# EAGLE board SparkFun_Touch_Screen_Connector_Breakout_DS_Panel_v11b (EAGLE 7.5.0)
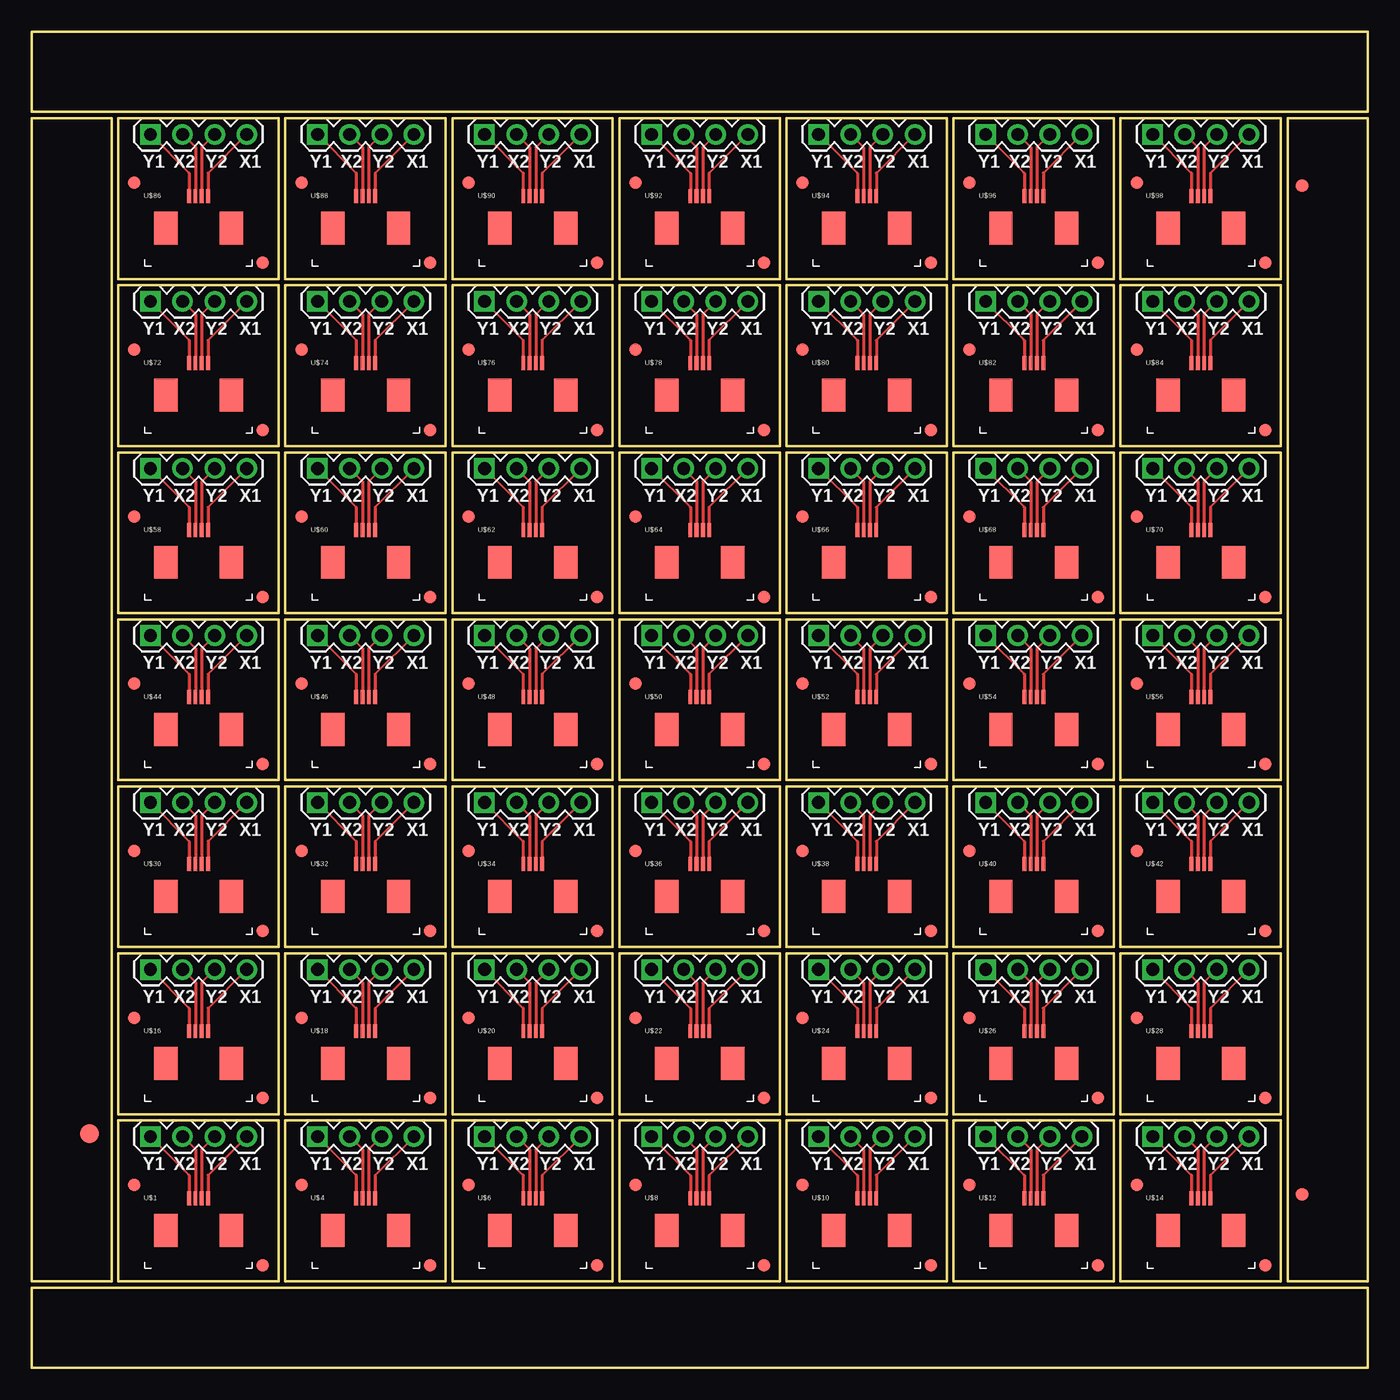
[diagram p0: board, top side]
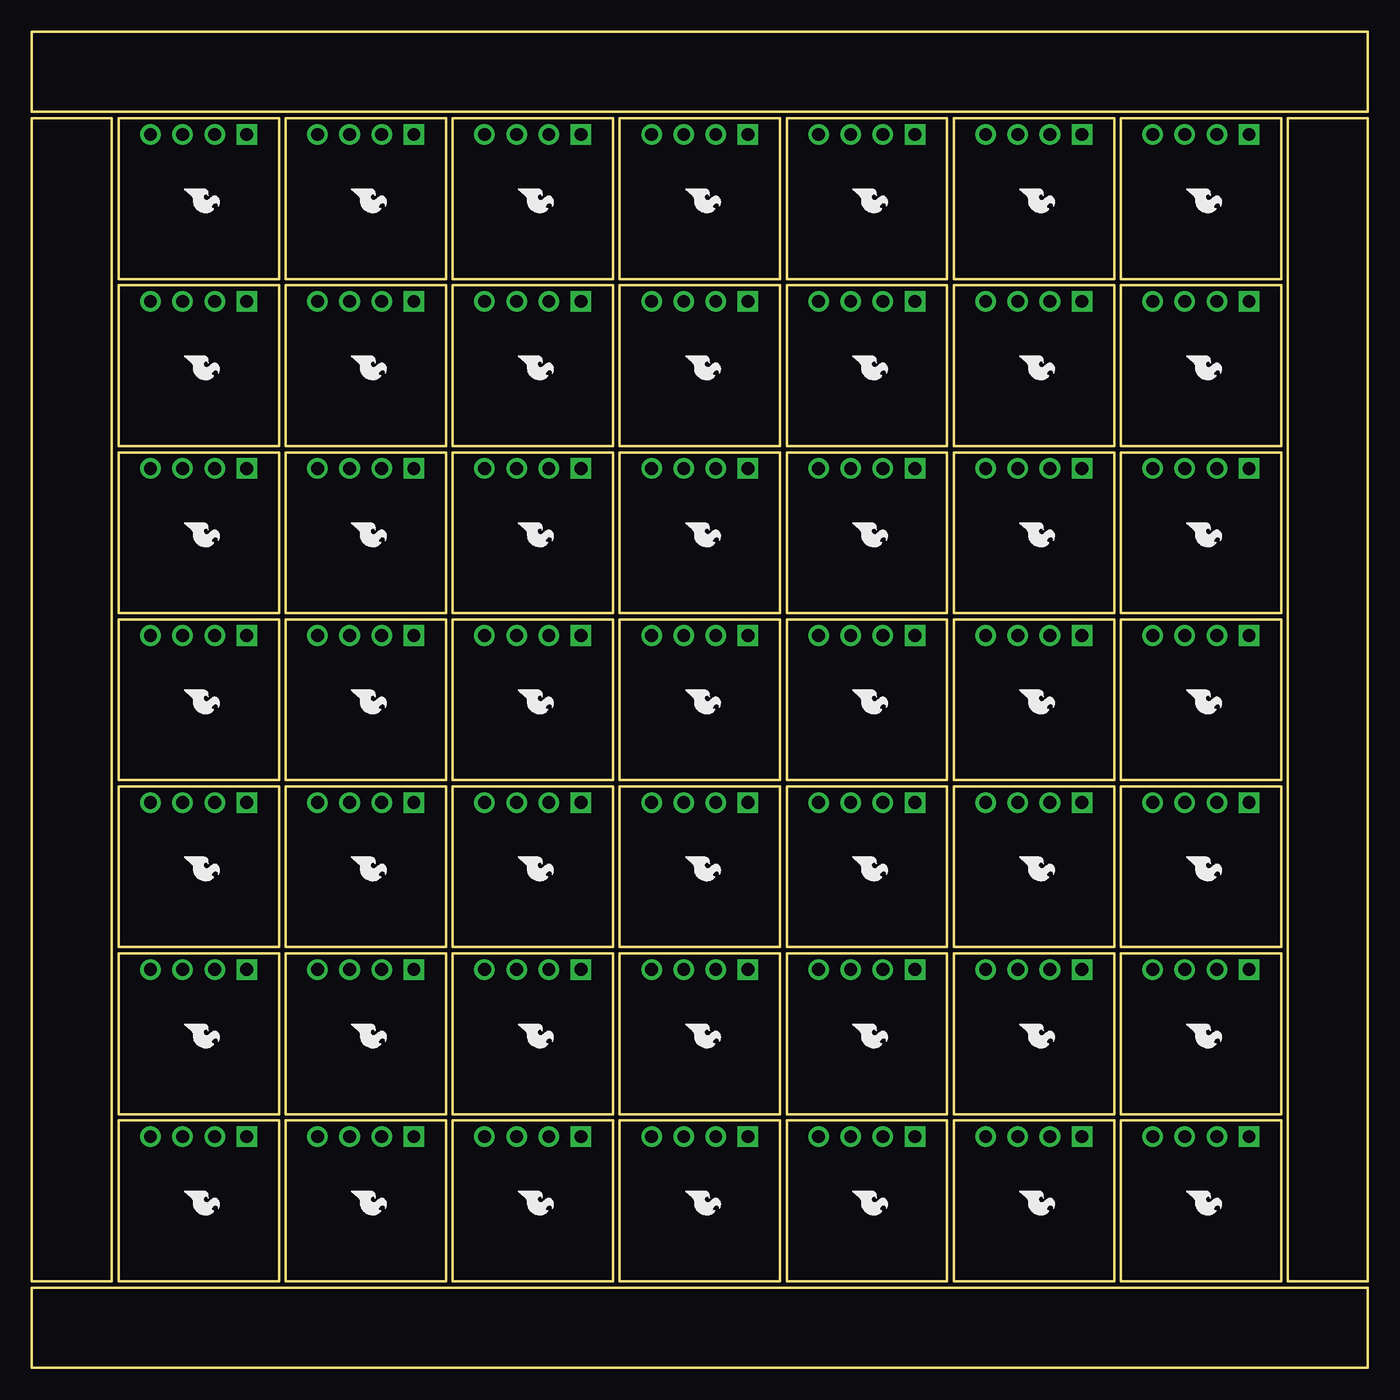
[diagram p1: board, bottom side, seen from below]

Size 105.66 x 105.66 mm. Coordinates in mm from the lower left corner, seen from the top.
Outline: 6.35,79.25 6.35,6.86 0,6.86 0,29.72
Outline: 0,27.18 0,98.81 6.35,98.81 6.35,76.71
Outline: 79.25,0 0,0 0,6.35 29.72,6.35
Outline: 27.18,6.35 105.66,6.35 105.66,0 76.71,0
Outline: 105.66,79.25 105.66,6.86 99.31,6.86 99.31,29.72
Outline: 99.31,27.18 99.31,98.81 105.66,98.81 105.66,76.71
Outline: 6.86,6.86 19.54,6.86 19.54,19.56 6.86,19.56 6.86,6.86
Outline: 20.07,6.86 32.75,6.86 32.75,19.56 20.07,19.56 20.07,6.86
Outline: 33.27,6.86 45.95,6.86 45.95,19.56 33.27,19.56 33.27,6.86
Outline: 46.48,6.86 59.16,6.86 59.16,19.56 46.48,19.56 46.48,6.86
Outline: 59.69,6.86 72.37,6.86 72.37,19.56 59.69,19.56 59.69,6.86
Outline: 72.9,6.86 85.58,6.86 85.58,19.56 72.9,19.56 72.9,6.86
Outline: 86.11,6.86 98.79,6.86 98.79,19.56 86.11,19.56 86.11,6.86
Outline: 6.86,20.07 19.54,20.07 19.54,32.77 6.86,32.77 6.86,20.07
Outline: 20.07,20.07 32.75,20.07 32.75,32.77 20.07,32.77 20.07,20.07
Outline: 33.27,20.07 45.95,20.07 45.95,32.77 33.27,32.77 33.27,20.07
Outline: 46.48,20.07 59.16,20.07 59.16,32.77 46.48,32.77 46.48,20.07
Outline: 59.69,20.07 72.37,20.07 72.37,32.77 59.69,32.77 59.69,20.07
Outline: 72.9,20.07 85.58,20.07 85.58,32.77 72.9,32.77 72.9,20.07
Outline: 86.11,20.07 98.79,20.07 98.79,32.77 86.11,32.77 86.11,20.07
Outline: 6.86,33.27 19.54,33.27 19.54,45.97 6.86,45.97 6.86,33.27
Outline: 20.07,33.27 32.75,33.27 32.75,45.97 20.07,45.97 20.07,33.27
Outline: 33.27,33.27 45.95,33.27 45.95,45.97 33.27,45.97 33.27,33.27
Outline: 46.48,33.27 59.16,33.27 59.16,45.97 46.48,45.97 46.48,33.27
Outline: 59.69,33.27 72.37,33.27 72.37,45.97 59.69,45.97 59.69,33.27
Outline: 72.9,33.27 85.58,33.27 85.58,45.97 72.9,45.97 72.9,33.27
Outline: 86.11,33.27 98.79,33.27 98.79,45.97 86.11,45.97 86.11,33.27
Outline: 6.86,46.48 19.54,46.48 19.54,59.18 6.86,59.18 6.86,46.48
Outline: 20.07,46.48 32.75,46.48 32.75,59.18 20.07,59.18 20.07,46.48
Outline: 33.27,46.48 45.95,46.48 45.95,59.18 33.27,59.18 33.27,46.48
Outline: 46.48,46.48 59.16,46.48 59.16,59.18 46.48,59.18 46.48,46.48
Outline: 59.69,46.48 72.37,46.48 72.37,59.18 59.69,59.18 59.69,46.48
Outline: 72.9,46.48 85.58,46.48 85.58,59.18 72.9,59.18 72.9,46.48
Outline: 86.11,46.48 98.79,46.48 98.79,59.18 86.11,59.18 86.11,46.48
Outline: 6.86,59.69 19.54,59.69 19.54,72.39 6.86,72.39 6.86,59.69
Outline: 20.07,59.69 32.75,59.69 32.75,72.39 20.07,72.39 20.07,59.69
Outline: 33.27,59.69 45.95,59.69 45.95,72.39 33.27,72.39 33.27,59.69
Outline: 46.48,59.69 59.16,59.69 59.16,72.39 46.48,72.39 46.48,59.69
Outline: 59.69,59.69 72.37,59.69 72.37,72.39 59.69,72.39 59.69,59.69
Outline: 72.9,59.69 85.58,59.69 85.58,72.39 72.9,72.39 72.9,59.69
Outline: 86.11,59.69 98.79,59.69 98.79,72.39 86.11,72.39 86.11,59.69
Outline: 6.86,72.9 19.54,72.9 19.54,85.6 6.86,85.6 6.86,72.9
Outline: 20.07,72.9 32.75,72.9 32.75,85.6 20.07,85.6 20.07,72.9
Outline: 33.27,72.9 45.95,72.9 45.95,85.6 33.27,85.6 33.27,72.9
Outline: 46.48,72.9 59.16,72.9 59.16,85.6 46.48,85.6 46.48,72.9
Outline: 59.69,72.9 72.37,72.9 72.37,85.6 59.69,85.6 59.69,72.9
Outline: 72.9,72.9 85.58,72.9 85.58,85.6 72.9,85.6 72.9,72.9
Outline: 86.11,72.9 98.79,72.9 98.79,85.6 86.11,85.6 86.11,72.9
Outline: 6.86,86.11 19.54,86.11 19.54,98.81 6.86,98.81 6.86,86.11
Outline: 20.07,86.11 32.75,86.11 32.75,98.81 20.07,98.81 20.07,86.11
Outline: 33.27,86.11 45.95,86.11 45.95,98.81 33.27,98.81 33.27,86.11
Outline: 46.48,86.11 59.16,86.11 59.16,98.81 46.48,98.81 46.48,86.11
Outline: 59.69,86.11 72.37,86.11 72.37,98.81 59.69,98.81 59.69,86.11
Outline: 72.9,86.11 85.58,86.11 85.58,98.81 72.9,98.81 72.9,86.11
Outline: 86.11,86.11 98.79,86.11 98.79,98.81 86.11,98.81 86.11,86.11
Outline: 105.66,105.66 0,105.66 0,99.31 105.66,99.31 105.66,105.66
Copper layers (1*16): Top 0.035mm / dielectric 1.5mm / Bottom 0.035mm
Design rules "SparkFun": minimum track width 8mil, minimum drill 20mil, track to track 8mil, track to pad 8mil, pad to pad 8mil, via to via 8mil, smd to smd 8mil, copper to edge 10mil, drill to drill 8mil, minimum pad ring 12mil, minimum via ring 10mil, stop-mask expansion 4mil, vias tented up to drill 25mil, thermal gap 10mil

## Footprints (pad centres in the part's own frame; a part is rotated, then mirrored left to right if it is on the bottom)
FIDUCIAL-1.5X3 = smd 1.5 x 1.5: 1 0,0
FIDUCIAL-1X2 = smd 1 x 1: 1 0,0
1X04 = drill 1.016 square: 1 0,0 | drill 1.016: 2 2.54,0; 3 5.08,0; 4 7.62,0
DS_TOUCH_CONNECTOR = smd 1.85 x 2.6: P$5 -2.6,0.2; P$6 2.6,0.2 | smd 0.3 x 1.1: X1 0.75,2.75; X2 -0.25,2.75; Y1 -0.75,2.75; Y2 0.25,2.75

## Placement (x,y rotation side)
E$1  [FIDUCIAL-1.5X3]  4.57,18.54 0 top
E$5  [FIDUCIAL-1X2]  100.46,13.72 0 top
E$6  [FIDUCIAL-1X2]  100.46,93.47 180 top
FID1  FIDUCIAL1X2  [FIDUCIAL-1X2]  8.13,14.48 0 top
FID2  FIDUCIAL1X2  [FIDUCIAL-1X2]  18.29,8.13 0 top
FID3  FIDUCIAL1X2  [FIDUCIAL-1X2]  21.34,14.48 0 top
FID4  FIDUCIAL1X2  [FIDUCIAL-1X2]  31.5,8.13 0 top
FID5  FIDUCIAL1X2  [FIDUCIAL-1X2]  34.54,14.48 0 top
FID6  FIDUCIAL1X2  [FIDUCIAL-1X2]  44.7,8.13 0 top
FID7  FIDUCIAL1X2  [FIDUCIAL-1X2]  47.75,14.48 0 top
FID8  FIDUCIAL1X2  [FIDUCIAL-1X2]  57.91,8.13 0 top
FID9  FIDUCIAL1X2  [FIDUCIAL-1X2]  60.96,14.48 0 top
FID10  FIDUCIAL1X2  [FIDUCIAL-1X2]  71.12,8.13 0 top
FID11  FIDUCIAL1X2  [FIDUCIAL-1X2]  74.17,14.48 0 top
FID12  FIDUCIAL1X2  [FIDUCIAL-1X2]  84.33,8.13 0 top
FID13  FIDUCIAL1X2  [FIDUCIAL-1X2]  87.38,14.48 0 top
FID14  FIDUCIAL1X2  [FIDUCIAL-1X2]  97.54,8.13 0 top
FID15  FIDUCIAL1X2  [FIDUCIAL-1X2]  8.13,27.69 0 top
FID16  FIDUCIAL1X2  [FIDUCIAL-1X2]  18.29,21.34 0 top
FID17  FIDUCIAL1X2  [FIDUCIAL-1X2]  21.34,27.69 0 top
FID18  FIDUCIAL1X2  [FIDUCIAL-1X2]  31.5,21.34 0 top
FID19  FIDUCIAL1X2  [FIDUCIAL-1X2]  34.54,27.69 0 top
FID20  FIDUCIAL1X2  [FIDUCIAL-1X2]  44.7,21.34 0 top
FID21  FIDUCIAL1X2  [FIDUCIAL-1X2]  47.75,27.69 0 top
FID22  FIDUCIAL1X2  [FIDUCIAL-1X2]  57.91,21.34 0 top
FID23  FIDUCIAL1X2  [FIDUCIAL-1X2]  60.96,27.69 0 top
FID24  FIDUCIAL1X2  [FIDUCIAL-1X2]  71.12,21.34 0 top
FID25  FIDUCIAL1X2  [FIDUCIAL-1X2]  74.17,27.69 0 top
FID26  FIDUCIAL1X2  [FIDUCIAL-1X2]  84.33,21.34 0 top
FID27  FIDUCIAL1X2  [FIDUCIAL-1X2]  87.38,27.69 0 top
FID28  FIDUCIAL1X2  [FIDUCIAL-1X2]  97.54,21.34 0 top
FID29  FIDUCIAL1X2  [FIDUCIAL-1X2]  8.13,40.89 0 top
FID30  FIDUCIAL1X2  [FIDUCIAL-1X2]  18.29,34.54 0 top
FID31  FIDUCIAL1X2  [FIDUCIAL-1X2]  21.34,40.89 0 top
FID32  FIDUCIAL1X2  [FIDUCIAL-1X2]  31.5,34.54 0 top
FID33  FIDUCIAL1X2  [FIDUCIAL-1X2]  34.54,40.89 0 top
FID34  FIDUCIAL1X2  [FIDUCIAL-1X2]  44.7,34.54 0 top
FID35  FIDUCIAL1X2  [FIDUCIAL-1X2]  47.75,40.89 0 top
FID36  FIDUCIAL1X2  [FIDUCIAL-1X2]  57.91,34.54 0 top
FID37  FIDUCIAL1X2  [FIDUCIAL-1X2]  60.96,40.89 0 top
FID38  FIDUCIAL1X2  [FIDUCIAL-1X2]  71.12,34.54 0 top
FID39  FIDUCIAL1X2  [FIDUCIAL-1X2]  74.17,40.89 0 top
FID40  FIDUCIAL1X2  [FIDUCIAL-1X2]  84.33,34.54 0 top
FID41  FIDUCIAL1X2  [FIDUCIAL-1X2]  87.38,40.89 0 top
FID42  FIDUCIAL1X2  [FIDUCIAL-1X2]  97.54,34.54 0 top
FID43  FIDUCIAL1X2  [FIDUCIAL-1X2]  8.13,54.1 0 top
FID44  FIDUCIAL1X2  [FIDUCIAL-1X2]  18.29,47.75 0 top
FID45  FIDUCIAL1X2  [FIDUCIAL-1X2]  21.34,54.1 0 top
FID46  FIDUCIAL1X2  [FIDUCIAL-1X2]  31.5,47.75 0 top
FID47  FIDUCIAL1X2  [FIDUCIAL-1X2]  34.54,54.1 0 top
FID48  FIDUCIAL1X2  [FIDUCIAL-1X2]  44.7,47.75 0 top
FID49  FIDUCIAL1X2  [FIDUCIAL-1X2]  47.75,54.1 0 top
FID50  FIDUCIAL1X2  [FIDUCIAL-1X2]  57.91,47.75 0 top
FID51  FIDUCIAL1X2  [FIDUCIAL-1X2]  60.96,54.1 0 top
FID52  FIDUCIAL1X2  [FIDUCIAL-1X2]  71.12,47.75 0 top
FID53  FIDUCIAL1X2  [FIDUCIAL-1X2]  74.17,54.1 0 top
FID54  FIDUCIAL1X2  [FIDUCIAL-1X2]  84.33,47.75 0 top
FID55  FIDUCIAL1X2  [FIDUCIAL-1X2]  87.38,54.1 0 top
FID56  FIDUCIAL1X2  [FIDUCIAL-1X2]  97.54,47.75 0 top
FID57  FIDUCIAL1X2  [FIDUCIAL-1X2]  8.13,67.31 0 top
FID58  FIDUCIAL1X2  [FIDUCIAL-1X2]  18.29,60.96 0 top
FID59  FIDUCIAL1X2  [FIDUCIAL-1X2]  21.34,67.31 0 top
FID60  FIDUCIAL1X2  [FIDUCIAL-1X2]  31.5,60.96 0 top
FID61  FIDUCIAL1X2  [FIDUCIAL-1X2]  34.54,67.31 0 top
FID62  FIDUCIAL1X2  [FIDUCIAL-1X2]  44.7,60.96 0 top
FID63  FIDUCIAL1X2  [FIDUCIAL-1X2]  47.75,67.31 0 top
FID64  FIDUCIAL1X2  [FIDUCIAL-1X2]  57.91,60.96 0 top
FID65  FIDUCIAL1X2  [FIDUCIAL-1X2]  60.96,67.31 0 top
FID66  FIDUCIAL1X2  [FIDUCIAL-1X2]  71.12,60.96 0 top
FID67  FIDUCIAL1X2  [FIDUCIAL-1X2]  74.17,67.31 0 top
FID68  FIDUCIAL1X2  [FIDUCIAL-1X2]  84.33,60.96 0 top
FID69  FIDUCIAL1X2  [FIDUCIAL-1X2]  87.38,67.31 0 top
FID70  FIDUCIAL1X2  [FIDUCIAL-1X2]  97.54,60.96 0 top
FID71  FIDUCIAL1X2  [FIDUCIAL-1X2]  8.13,80.52 0 top
FID72  FIDUCIAL1X2  [FIDUCIAL-1X2]  18.29,74.17 0 top
FID73  FIDUCIAL1X2  [FIDUCIAL-1X2]  21.34,80.52 0 top
FID74  FIDUCIAL1X2  [FIDUCIAL-1X2]  31.5,74.17 0 top
FID75  FIDUCIAL1X2  [FIDUCIAL-1X2]  34.54,80.52 0 top
FID76  FIDUCIAL1X2  [FIDUCIAL-1X2]  44.7,74.17 0 top
FID77  FIDUCIAL1X2  [FIDUCIAL-1X2]  47.75,80.52 0 top
FID78  FIDUCIAL1X2  [FIDUCIAL-1X2]  57.91,74.17 0 top
FID79  FIDUCIAL1X2  [FIDUCIAL-1X2]  60.96,80.52 0 top
FID80  FIDUCIAL1X2  [FIDUCIAL-1X2]  71.12,74.17 0 top
FID81  FIDUCIAL1X2  [FIDUCIAL-1X2]  74.17,80.52 0 top
FID82  FIDUCIAL1X2  [FIDUCIAL-1X2]  84.33,74.17 0 top
FID83  FIDUCIAL1X2  [FIDUCIAL-1X2]  87.38,80.52 0 top
FID84  FIDUCIAL1X2  [FIDUCIAL-1X2]  97.54,74.17 0 top
FID85  FIDUCIAL1X2  [FIDUCIAL-1X2]  8.13,93.73 0 top
FID86  FIDUCIAL1X2  [FIDUCIAL-1X2]  18.29,87.38 0 top
FID87  FIDUCIAL1X2  [FIDUCIAL-1X2]  21.34,93.73 0 top
FID88  FIDUCIAL1X2  [FIDUCIAL-1X2]  31.5,87.38 0 top
FID89  FIDUCIAL1X2  [FIDUCIAL-1X2]  34.54,93.73 0 top
FID90  FIDUCIAL1X2  [FIDUCIAL-1X2]  44.7,87.38 0 top
FID91  FIDUCIAL1X2  [FIDUCIAL-1X2]  47.75,93.73 0 top
FID92  FIDUCIAL1X2  [FIDUCIAL-1X2]  57.91,87.38 0 top
FID93  FIDUCIAL1X2  [FIDUCIAL-1X2]  60.96,93.73 0 top
FID94  FIDUCIAL1X2  [FIDUCIAL-1X2]  71.12,87.38 0 top
FID95  FIDUCIAL1X2  [FIDUCIAL-1X2]  74.17,93.73 0 top
FID96  FIDUCIAL1X2  [FIDUCIAL-1X2]  84.33,87.38 0 top
FID97  FIDUCIAL1X2  [FIDUCIAL-1X2]  87.38,93.73 0 top
FID98  FIDUCIAL1X2  [FIDUCIAL-1X2]  97.54,87.38 0 top
JP1  [1X04]  9.4,18.29 0 top
JP2  [1X04]  22.61,18.29 0 top
JP3  [1X04]  35.81,18.29 0 top
JP4  [1X04]  49.02,18.29 0 top
JP5  [1X04]  62.23,18.29 0 top
JP6  [1X04]  75.44,18.29 0 top
JP7  [1X04]  88.65,18.29 0 top
JP8  [1X04]  9.4,31.5 0 top
JP9  [1X04]  22.61,31.5 0 top
JP10  [1X04]  35.81,31.5 0 top
JP11  [1X04]  49.02,31.5 0 top
JP12  [1X04]  62.23,31.5 0 top
JP13  [1X04]  75.44,31.5 0 top
JP14  [1X04]  88.65,31.5 0 top
JP15  [1X04]  9.4,44.7 0 top
JP16  [1X04]  22.61,44.7 0 top
JP17  [1X04]  35.81,44.7 0 top
JP18  [1X04]  49.02,44.7 0 top
JP19  [1X04]  62.23,44.7 0 top
JP20  [1X04]  75.44,44.7 0 top
JP21  [1X04]  88.65,44.7 0 top
JP22  [1X04]  9.4,57.91 0 top
JP23  [1X04]  22.61,57.91 0 top
JP24  [1X04]  35.81,57.91 0 top
JP25  [1X04]  49.02,57.91 0 top
JP26  [1X04]  62.23,57.91 0 top
JP27  [1X04]  75.44,57.91 0 top
JP28  [1X04]  88.65,57.91 0 top
JP29  [1X04]  9.4,71.12 0 top
JP30  [1X04]  22.61,71.12 0 top
JP31  [1X04]  35.81,71.12 0 top
JP32  [1X04]  49.02,71.12 0 top
JP33  [1X04]  62.23,71.12 0 top
JP34  [1X04]  75.44,71.12 0 top
JP35  [1X04]  88.65,71.12 0 top
JP36  [1X04]  9.4,84.33 0 top
JP37  [1X04]  22.61,84.33 0 top
JP38  [1X04]  35.81,84.33 0 top
JP39  [1X04]  49.02,84.33 0 top
JP40  [1X04]  62.23,84.33 0 top
JP41  [1X04]  75.44,84.33 0 top
JP42  [1X04]  88.65,84.33 0 top
JP43  [1X04]  9.4,97.54 0 top
JP44  [1X04]  22.61,97.54 0 top
JP45  [1X04]  35.81,97.54 0 top
JP46  [1X04]  49.02,97.54 0 top
JP47  [1X04]  62.23,97.54 0 top
JP48  [1X04]  75.44,97.54 0 top
JP49  [1X04]  88.65,97.54 0 top
U$1  DS_TOUCH_CONNECTOR  [DS_TOUCH_CONNECTOR]  13.21,10.67 0 top
U$2  LOGO-SFESK  [SFE-LOGO-FLAME]  14.35,13.97 270 bottom
U$3  LOGO-SFESK  [SFE-LOGO-FLAME]  27.56,13.97 270 bottom
U$4  DS_TOUCH_CONNECTOR  [DS_TOUCH_CONNECTOR]  26.42,10.67 0 top
U$5  LOGO-SFESK  [SFE-LOGO-FLAME]  40.77,13.97 270 bottom
U$6  DS_TOUCH_CONNECTOR  [DS_TOUCH_CONNECTOR]  39.62,10.67 0 top
U$7  LOGO-SFESK  [SFE-LOGO-FLAME]  53.98,13.97 270 bottom
U$8  DS_TOUCH_CONNECTOR  [DS_TOUCH_CONNECTOR]  52.83,10.67 0 top
U$9  LOGO-SFESK  [SFE-LOGO-FLAME]  67.18,13.97 270 bottom
U$10  DS_TOUCH_CONNECTOR  [DS_TOUCH_CONNECTOR]  66.04,10.67 0 top
U$11  LOGO-SFESK  [SFE-LOGO-FLAME]  80.39,13.97 270 bottom
U$12  DS_TOUCH_CONNECTOR  [DS_TOUCH_CONNECTOR]  79.25,10.67 0 top
U$13  LOGO-SFESK  [SFE-LOGO-FLAME]  93.6,13.97 270 bottom
U$14  DS_TOUCH_CONNECTOR  [DS_TOUCH_CONNECTOR]  92.46,10.67 0 top
U$15  LOGO-SFESK  [SFE-LOGO-FLAME]  14.35,27.18 270 bottom
U$16  DS_TOUCH_CONNECTOR  [DS_TOUCH_CONNECTOR]  13.21,23.88 0 top
U$17  LOGO-SFESK  [SFE-LOGO-FLAME]  27.56,27.18 270 bottom
U$18  DS_TOUCH_CONNECTOR  [DS_TOUCH_CONNECTOR]  26.42,23.88 0 top
U$19  LOGO-SFESK  [SFE-LOGO-FLAME]  40.77,27.18 270 bottom
U$20  DS_TOUCH_CONNECTOR  [DS_TOUCH_CONNECTOR]  39.62,23.88 0 top
U$21  LOGO-SFESK  [SFE-LOGO-FLAME]  53.98,27.18 270 bottom
U$22  DS_TOUCH_CONNECTOR  [DS_TOUCH_CONNECTOR]  52.83,23.88 0 top
U$23  LOGO-SFESK  [SFE-LOGO-FLAME]  67.18,27.18 270 bottom
U$24  DS_TOUCH_CONNECTOR  [DS_TOUCH_CONNECTOR]  66.04,23.88 0 top
U$25  LOGO-SFESK  [SFE-LOGO-FLAME]  80.39,27.18 270 bottom
U$26  DS_TOUCH_CONNECTOR  [DS_TOUCH_CONNECTOR]  79.25,23.88 0 top
U$27  LOGO-SFESK  [SFE-LOGO-FLAME]  93.6,27.18 270 bottom
U$28  DS_TOUCH_CONNECTOR  [DS_TOUCH_CONNECTOR]  92.46,23.88 0 top
U$29  LOGO-SFESK  [SFE-LOGO-FLAME]  14.35,40.39 270 bottom
U$30  DS_TOUCH_CONNECTOR  [DS_TOUCH_CONNECTOR]  13.21,37.08 0 top
U$31  LOGO-SFESK  [SFE-LOGO-FLAME]  27.56,40.39 270 bottom
U$32  DS_TOUCH_CONNECTOR  [DS_TOUCH_CONNECTOR]  26.42,37.08 0 top
U$33  LOGO-SFESK  [SFE-LOGO-FLAME]  40.77,40.39 270 bottom
U$34  DS_TOUCH_CONNECTOR  [DS_TOUCH_CONNECTOR]  39.62,37.08 0 top
U$35  LOGO-SFESK  [SFE-LOGO-FLAME]  53.98,40.39 270 bottom
U$36  DS_TOUCH_CONNECTOR  [DS_TOUCH_CONNECTOR]  52.83,37.08 0 top
U$37  LOGO-SFESK  [SFE-LOGO-FLAME]  67.18,40.39 270 bottom
U$38  DS_TOUCH_CONNECTOR  [DS_TOUCH_CONNECTOR]  66.04,37.08 0 top
U$39  LOGO-SFESK  [SFE-LOGO-FLAME]  80.39,40.39 270 bottom
U$40  DS_TOUCH_CONNECTOR  [DS_TOUCH_CONNECTOR]  79.25,37.08 0 top
U$41  LOGO-SFESK  [SFE-LOGO-FLAME]  93.6,40.39 270 bottom
U$42  DS_TOUCH_CONNECTOR  [DS_TOUCH_CONNECTOR]  92.46,37.08 0 top
U$43  LOGO-SFESK  [SFE-LOGO-FLAME]  14.35,53.59 270 bottom
U$44  DS_TOUCH_CONNECTOR  [DS_TOUCH_CONNECTOR]  13.21,50.29 0 top
U$45  LOGO-SFESK  [SFE-LOGO-FLAME]  27.56,53.59 270 bottom
U$46  DS_TOUCH_CONNECTOR  [DS_TOUCH_CONNECTOR]  26.42,50.29 0 top
U$47  LOGO-SFESK  [SFE-LOGO-FLAME]  40.77,53.59 270 bottom
U$48  DS_TOUCH_CONNECTOR  [DS_TOUCH_CONNECTOR]  39.62,50.29 0 top
U$49  LOGO-SFESK  [SFE-LOGO-FLAME]  53.98,53.59 270 bottom
U$50  DS_TOUCH_CONNECTOR  [DS_TOUCH_CONNECTOR]  52.83,50.29 0 top
U$51  LOGO-SFESK  [SFE-LOGO-FLAME]  67.18,53.59 270 bottom
U$52  DS_TOUCH_CONNECTOR  [DS_TOUCH_CONNECTOR]  66.04,50.29 0 top
U$53  LOGO-SFESK  [SFE-LOGO-FLAME]  80.39,53.59 270 bottom
U$54  DS_TOUCH_CONNECTOR  [DS_TOUCH_CONNECTOR]  79.25,50.29 0 top
U$55  LOGO-SFESK  [SFE-LOGO-FLAME]  93.6,53.59 270 bottom
U$56  DS_TOUCH_CONNECTOR  [DS_TOUCH_CONNECTOR]  92.46,50.29 0 top
U$57  LOGO-SFESK  [SFE-LOGO-FLAME]  14.35,66.8 270 bottom
U$58  DS_TOUCH_CONNECTOR  [DS_TOUCH_CONNECTOR]  13.21,63.5 0 top
U$59  LOGO-SFESK  [SFE-LOGO-FLAME]  27.56,66.8 270 bottom
U$60  DS_TOUCH_CONNECTOR  [DS_TOUCH_CONNECTOR]  26.42,63.5 0 top
U$61  LOGO-SFESK  [SFE-LOGO-FLAME]  40.77,66.8 270 bottom
U$62  DS_TOUCH_CONNECTOR  [DS_TOUCH_CONNECTOR]  39.62,63.5 0 top
U$63  LOGO-SFESK  [SFE-LOGO-FLAME]  53.98,66.8 270 bottom
U$64  DS_TOUCH_CONNECTOR  [DS_TOUCH_CONNECTOR]  52.83,63.5 0 top
U$65  LOGO-SFESK  [SFE-LOGO-FLAME]  67.18,66.8 270 bottom
U$66  DS_TOUCH_CONNECTOR  [DS_TOUCH_CONNECTOR]  66.04,63.5 0 top
U$67  LOGO-SFESK  [SFE-LOGO-FLAME]  80.39,66.8 270 bottom
U$68  DS_TOUCH_CONNECTOR  [DS_TOUCH_CONNECTOR]  79.25,63.5 0 top
U$69  LOGO-SFESK  [SFE-LOGO-FLAME]  93.6,66.8 270 bottom
U$70  DS_TOUCH_CONNECTOR  [DS_TOUCH_CONNECTOR]  92.46,63.5 0 top
U$71  LOGO-SFESK  [SFE-LOGO-FLAME]  14.35,80.01 270 bottom
U$72  DS_TOUCH_CONNECTOR  [DS_TOUCH_CONNECTOR]  13.21,76.71 0 top
U$73  LOGO-SFESK  [SFE-LOGO-FLAME]  27.56,80.01 270 bottom
U$74  DS_TOUCH_CONNECTOR  [DS_TOUCH_CONNECTOR]  26.42,76.71 0 top
U$75  LOGO-SFESK  [SFE-LOGO-FLAME]  40.77,80.01 270 bottom
U$76  DS_TOUCH_CONNECTOR  [DS_TOUCH_CONNECTOR]  39.62,76.71 0 top
U$77  LOGO-SFESK  [SFE-LOGO-FLAME]  53.98,80.01 270 bottom
U$78  DS_TOUCH_CONNECTOR  [DS_TOUCH_CONNECTOR]  52.83,76.71 0 top
U$79  LOGO-SFESK  [SFE-LOGO-FLAME]  67.18,80.01 270 bottom
U$80  DS_TOUCH_CONNECTOR  [DS_TOUCH_CONNECTOR]  66.04,76.71 0 top
U$81  LOGO-SFESK  [SFE-LOGO-FLAME]  80.39,80.01 270 bottom
U$82  DS_TOUCH_CONNECTOR  [DS_TOUCH_CONNECTOR]  79.25,76.71 0 top
U$83  LOGO-SFESK  [SFE-LOGO-FLAME]  93.6,80.01 270 bottom
U$84  DS_TOUCH_CONNECTOR  [DS_TOUCH_CONNECTOR]  92.46,76.71 0 top
U$85  LOGO-SFESK  [SFE-LOGO-FLAME]  14.35,93.22 270 bottom
U$86  DS_TOUCH_CONNECTOR  [DS_TOUCH_CONNECTOR]  13.21,89.92 0 top
U$87  LOGO-SFESK  [SFE-LOGO-FLAME]  27.56,93.22 270 bottom
U$88  DS_TOUCH_CONNECTOR  [DS_TOUCH_CONNECTOR]  26.42,89.92 0 top
U$89  LOGO-SFESK  [SFE-LOGO-FLAME]  40.77,93.22 270 bottom
U$90  DS_TOUCH_CONNECTOR  [DS_TOUCH_CONNECTOR]  39.62,89.92 0 top
U$91  LOGO-SFESK  [SFE-LOGO-FLAME]  53.98,93.22 270 bottom
U$92  DS_TOUCH_CONNECTOR  [DS_TOUCH_CONNECTOR]  52.83,89.92 0 top
U$93  LOGO-SFESK  [SFE-LOGO-FLAME]  67.18,93.22 270 bottom
U$94  DS_TOUCH_CONNECTOR  [DS_TOUCH_CONNECTOR]  66.04,89.92 0 top
U$95  LOGO-SFESK  [SFE-LOGO-FLAME]  80.39,93.22 270 bottom
U$96  DS_TOUCH_CONNECTOR  [DS_TOUCH_CONNECTOR]  79.25,89.92 0 top
U$97  LOGO-SFESK  [SFE-LOGO-FLAME]  93.6,93.22 270 bottom
U$98  DS_TOUCH_CONNECTOR  [DS_TOUCH_CONNECTOR]  92.46,89.92 0 top

## Library data of the parts
E$1 = SparkFun-Retired
E$5 E$6 FID1-FID98 = SparkFun-Aesthetics
JP1-JP49 U$1-U$98 = SparkFun

## Nets
N$1: JP1.4 U$1.X1
N$2: JP1.3 U$1.Y2
N$3: JP1.2 U$1.X2
N$4: JP1.1 U$1.Y1
N$5: JP2.4 U$4.X1
N$6: JP2.3 U$4.Y2
N$7: JP2.2 U$4.X2
N$8: JP2.1 U$4.Y1
N$9: JP3.4 U$6.X1
N$10: JP3.3 U$6.Y2
N$11: JP3.2 U$6.X2
N$12: JP3.1 U$6.Y1
N$13: JP4.4 U$8.X1
N$14: JP4.3 U$8.Y2
N$15: JP4.2 U$8.X2
N$16: JP4.1 U$8.Y1
N$17: JP5.4 U$10.X1
N$18: JP5.3 U$10.Y2
N$19: JP5.2 U$10.X2
N$20: JP5.1 U$10.Y1
N$21: JP6.4 U$12.X1
N$22: JP6.3 U$12.Y2
N$23: JP6.2 U$12.X2
N$24: JP6.1 U$12.Y1
N$25: JP7.4 U$14.X1
N$26: JP7.3 U$14.Y2
N$27: JP7.2 U$14.X2
N$28: JP7.1 U$14.Y1
N$29: JP8.4 U$16.X1
N$30: JP8.3 U$16.Y2
N$31: JP8.2 U$16.X2
N$32: JP8.1 U$16.Y1
N$33: JP9.4 U$18.X1
N$34: JP9.3 U$18.Y2
N$35: JP9.2 U$18.X2
N$36: JP9.1 U$18.Y1
N$37: JP10.4 U$20.X1
N$38: JP10.3 U$20.Y2
N$39: JP10.2 U$20.X2
N$40: JP10.1 U$20.Y1
N$41: JP11.4 U$22.X1
N$42: JP11.3 U$22.Y2
N$43: JP11.2 U$22.X2
N$44: JP11.1 U$22.Y1
N$45: JP12.4 U$24.X1
N$46: JP12.3 U$24.Y2
N$47: JP12.2 U$24.X2
N$48: JP12.1 U$24.Y1
N$49: JP13.4 U$26.X1
N$50: JP13.3 U$26.Y2
N$51: JP13.2 U$26.X2
N$52: JP13.1 U$26.Y1
N$53: JP14.4 U$28.X1
N$54: JP14.3 U$28.Y2
N$55: JP14.2 U$28.X2
N$56: JP14.1 U$28.Y1
N$57: JP15.4 U$30.X1
N$58: JP15.3 U$30.Y2
N$59: JP15.2 U$30.X2
N$60: JP15.1 U$30.Y1
N$61: JP16.4 U$32.X1
N$62: JP16.3 U$32.Y2
N$63: JP16.2 U$32.X2
N$64: JP16.1 U$32.Y1
N$65: JP17.4 U$34.X1
N$66: JP17.3 U$34.Y2
N$67: JP17.2 U$34.X2
N$68: JP17.1 U$34.Y1
N$69: JP18.4 U$36.X1
N$70: JP18.3 U$36.Y2
N$71: JP18.2 U$36.X2
N$72: JP18.1 U$36.Y1
N$73: JP19.4 U$38.X1
N$74: JP19.3 U$38.Y2
N$75: JP19.2 U$38.X2
N$76: JP19.1 U$38.Y1
N$77: JP20.4 U$40.X1
N$78: JP20.3 U$40.Y2
N$79: JP20.2 U$40.X2
N$80: JP20.1 U$40.Y1
N$81: JP21.4 U$42.X1
N$82: JP21.3 U$42.Y2
N$83: JP21.2 U$42.X2
N$84: JP21.1 U$42.Y1
N$85: JP22.4 U$44.X1
N$86: JP22.3 U$44.Y2
N$87: JP22.2 U$44.X2
N$88: JP22.1 U$44.Y1
N$89: JP23.4 U$46.X1
N$90: JP23.3 U$46.Y2
N$91: JP23.2 U$46.X2
N$92: JP23.1 U$46.Y1
N$93: JP24.4 U$48.X1
N$94: JP24.3 U$48.Y2
N$95: JP24.2 U$48.X2
N$96: JP24.1 U$48.Y1
N$97: JP25.4 U$50.X1
N$98: JP25.3 U$50.Y2
N$99: JP25.2 U$50.X2
N$100: JP25.1 U$50.Y1
N$101: JP26.4 U$52.X1
N$102: JP26.3 U$52.Y2
N$103: JP26.2 U$52.X2
N$104: JP26.1 U$52.Y1
N$105: JP27.4 U$54.X1
N$106: JP27.3 U$54.Y2
N$107: JP27.2 U$54.X2
N$108: JP27.1 U$54.Y1
N$109: JP28.4 U$56.X1
N$110: JP28.3 U$56.Y2
N$111: JP28.2 U$56.X2
N$112: JP28.1 U$56.Y1
N$113: JP29.4 U$58.X1
N$114: JP29.3 U$58.Y2
N$115: JP29.2 U$58.X2
N$116: JP29.1 U$58.Y1
N$117: JP30.4 U$60.X1
N$118: JP30.3 U$60.Y2
N$119: JP30.2 U$60.X2
N$120: JP30.1 U$60.Y1
N$121: JP31.4 U$62.X1
N$122: JP31.3 U$62.Y2
N$123: JP31.2 U$62.X2
N$124: JP31.1 U$62.Y1
N$125: JP32.4 U$64.X1
N$126: JP32.3 U$64.Y2
N$127: JP32.2 U$64.X2
N$128: JP32.1 U$64.Y1
N$129: JP33.4 U$66.X1
N$130: JP33.3 U$66.Y2
N$131: JP33.2 U$66.X2
N$132: JP33.1 U$66.Y1
N$133: JP34.4 U$68.X1
N$134: JP34.3 U$68.Y2
N$135: JP34.2 U$68.X2
N$136: JP34.1 U$68.Y1
N$137: JP35.4 U$70.X1
N$138: JP35.3 U$70.Y2
N$139: JP35.2 U$70.X2
N$140: JP35.1 U$70.Y1
N$141: JP36.4 U$72.X1
N$142: JP36.3 U$72.Y2
N$143: JP36.2 U$72.X2
N$144: JP36.1 U$72.Y1
N$145: JP37.4 U$74.X1
N$146: JP37.3 U$74.Y2
N$147: JP37.2 U$74.X2
N$148: JP37.1 U$74.Y1
N$149: JP38.4 U$76.X1
N$150: JP38.3 U$76.Y2
N$151: JP38.2 U$76.X2
N$152: JP38.1 U$76.Y1
N$153: JP39.4 U$78.X1
N$154: JP39.3 U$78.Y2
N$155: JP39.2 U$78.X2
N$156: JP39.1 U$78.Y1
N$157: JP40.4 U$80.X1
N$158: JP40.3 U$80.Y2
N$159: JP40.2 U$80.X2
N$160: JP40.1 U$80.Y1
N$161: JP41.4 U$82.X1
N$162: JP41.3 U$82.Y2
N$163: JP41.2 U$82.X2
N$164: JP41.1 U$82.Y1
N$165: JP42.4 U$84.X1
N$166: JP42.3 U$84.Y2
N$167: JP42.2 U$84.X2
N$168: JP42.1 U$84.Y1
N$169: JP43.4 U$86.X1
N$170: JP43.3 U$86.Y2
N$171: JP43.2 U$86.X2
N$172: JP43.1 U$86.Y1
N$173: JP44.4 U$88.X1
N$174: JP44.3 U$88.Y2
N$175: JP44.2 U$88.X2
N$176: JP44.1 U$88.Y1
N$177: JP45.4 U$90.X1
N$178: JP45.3 U$90.Y2
N$179: JP45.2 U$90.X2
N$180: JP45.1 U$90.Y1
N$181: JP46.4 U$92.X1
N$182: JP46.3 U$92.Y2
N$183: JP46.2 U$92.X2
N$184: JP46.1 U$92.Y1
N$185: JP47.4 U$94.X1
N$186: JP47.3 U$94.Y2
N$187: JP47.2 U$94.X2
N$188: JP47.1 U$94.Y1
N$189: JP48.4 U$96.X1
N$190: JP48.3 U$96.Y2
N$191: JP48.2 U$96.X2
N$192: JP48.1 U$96.Y1
N$193: JP49.4 U$98.X1
N$194: JP49.3 U$98.Y2
N$195: JP49.2 U$98.X2
N$196: JP49.1 U$98.Y1

## Tracks (layer width: path | path; a pad name or v marks a point on that pad's centre or on a via)
N$1
  Top 0.203: 13.96,15.23 JP1.4
  Top 0.254: 13.96,15.23 U$1.X1
N$2
  Top 0.203: 13.46,17.27 JP1.3
  Top 0.254: 13.46,17.27 U$1.Y2
N$3
  Top 0.203: JP1.2 12.96,17.27
  Top 0.254: 12.96,17.27 U$1.X2
N$4
  Top 0.203: JP1.1 12.46,15.23
  Top 0.254: 12.46,15.23 U$1.Y1
N$5
  Top 0.203: 27.17,15.23 JP2.4
  Top 0.254: 27.17,15.23 U$4.X1
N$6
  Top 0.203: 26.67,17.27 JP2.3
  Top 0.254: 26.67,17.27 U$4.Y2
N$7
  Top 0.203: JP2.2 26.17,17.27
  Top 0.254: 26.17,17.27 U$4.X2
N$8
  Top 0.203: JP2.1 25.67,15.23
  Top 0.254: 25.67,15.23 U$4.Y1
N$9
  Top 0.203: 40.37,15.23 JP3.4
  Top 0.254: 40.37,15.23 U$6.X1
N$10
  Top 0.203: 39.87,17.27 JP3.3
  Top 0.254: 39.87,17.27 U$6.Y2
N$11
  Top 0.203: JP3.2 39.37,17.27
  Top 0.254: 39.37,17.27 U$6.X2
N$12
  Top 0.203: JP3.1 38.87,15.23
  Top 0.254: 38.87,15.23 U$6.Y1
N$13
  Top 0.203: 53.58,15.23 JP4.4
  Top 0.254: 53.58,15.23 U$8.X1
N$14
  Top 0.203: 53.08,17.27 JP4.3
  Top 0.254: 53.08,17.27 U$8.Y2
N$15
  Top 0.203: JP4.2 52.58,17.27
  Top 0.254: 52.58,17.27 U$8.X2
N$16
  Top 0.203: JP4.1 52.08,15.23
  Top 0.254: 52.08,15.23 U$8.Y1
N$17
  Top 0.203: 66.79,15.23 JP5.4
  Top 0.254: 66.79,15.23 U$10.X1
N$18
  Top 0.203: 66.29,17.27 JP5.3
  Top 0.254: 66.29,17.27 U$10.Y2
N$19
  Top 0.203: JP5.2 65.79,17.27
  Top 0.254: 65.79,17.27 U$10.X2
N$20
  Top 0.203: JP5.1 65.29,15.23
  Top 0.254: 65.29,15.23 U$10.Y1
N$21
  Top 0.203: 80,15.23 JP6.4
  Top 0.254: 80,15.23 U$12.X1
N$22
  Top 0.203: 79.5,17.27 JP6.3
  Top 0.254: 79.5,17.27 U$12.Y2
N$23
  Top 0.203: JP6.2 79,17.27
  Top 0.254: 79,17.27 U$12.X2
N$24
  Top 0.203: JP6.1 78.5,15.23
  Top 0.254: 78.5,15.23 U$12.Y1
N$25
  Top 0.203: 93.21,15.23 JP7.4
  Top 0.254: 93.21,15.23 U$14.X1
N$26
  Top 0.203: 92.71,17.27 JP7.3
  Top 0.254: 92.71,17.27 U$14.Y2
N$27
  Top 0.203: JP7.2 92.21,17.27
  Top 0.254: 92.21,17.27 U$14.X2
N$28
  Top 0.203: JP7.1 91.71,15.23
  Top 0.254: 91.71,15.23 U$14.Y1
N$29
  Top 0.203: 13.96,28.44 JP8.4
  Top 0.254: 13.96,28.44 U$16.X1
N$30
  Top 0.203: 13.46,30.48 JP8.3
  Top 0.254: 13.46,30.48 U$16.Y2
N$31
  Top 0.203: JP8.2 12.96,30.48
  Top 0.254: 12.96,30.48 U$16.X2
N$32
  Top 0.203: JP8.1 12.46,28.44
  Top 0.254: 12.46,28.44 U$16.Y1
N$33
  Top 0.203: 27.17,28.44 JP9.4
  Top 0.254: 27.17,28.44 U$18.X1
N$34
  Top 0.203: 26.67,30.48 JP9.3
  Top 0.254: 26.67,30.48 U$18.Y2
N$35
  Top 0.203: JP9.2 26.17,30.48
  Top 0.254: 26.17,30.48 U$18.X2
N$36
  Top 0.203: JP9.1 25.67,28.44
  Top 0.254: 25.67,28.44 U$18.Y1
N$37
  Top 0.203: 40.37,28.44 JP10.4
  Top 0.254: 40.37,28.44 U$20.X1
N$38
  Top 0.203: 39.87,30.48 JP10.3
  Top 0.254: 39.87,30.48 U$20.Y2
N$39
  Top 0.203: JP10.2 39.37,30.48
  Top 0.254: 39.37,30.48 U$20.X2
N$40
  Top 0.203: JP10.1 38.87,28.44
  Top 0.254: 38.87,28.44 U$20.Y1
N$41
  Top 0.203: 53.58,28.44 JP11.4
  Top 0.254: 53.58,28.44 U$22.X1
N$42
  Top 0.203: 53.08,30.48 JP11.3
  Top 0.254: 53.08,30.48 U$22.Y2
N$43
  Top 0.203: JP11.2 52.58,30.48
  Top 0.254: 52.58,30.48 U$22.X2
N$44
  Top 0.203: JP11.1 52.08,28.44
  Top 0.254: 52.08,28.44 U$22.Y1
N$45
  Top 0.203: 66.79,28.44 JP12.4
  Top 0.254: 66.79,28.44 U$24.X1
N$46
  Top 0.203: 66.29,30.48 JP12.3
  Top 0.254: 66.29,30.48 U$24.Y2
N$47
  Top 0.203: JP12.2 65.79,30.48
  Top 0.254: 65.79,30.48 U$24.X2
N$48
  Top 0.203: JP12.1 65.29,28.44
  Top 0.254: 65.29,28.44 U$24.Y1
N$49
  Top 0.203: 80,28.44 JP13.4
  Top 0.254: 80,28.44 U$26.X1
N$50
  Top 0.203: 79.5,30.48 JP13.3
  Top 0.254: 79.5,30.48 U$26.Y2
N$51
  Top 0.203: JP13.2 79,30.48
  Top 0.254: 79,30.48 U$26.X2
N$52
  Top 0.203: JP13.1 78.5,28.44
  Top 0.254: 78.5,28.44 U$26.Y1
N$53
  Top 0.203: 93.21,28.44 JP14.4
  Top 0.254: 93.21,28.44 U$28.X1
N$54
  Top 0.203: 92.71,30.48 JP14.3
  Top 0.254: 92.71,30.48 U$28.Y2
N$55
  Top 0.203: JP14.2 92.21,30.48
  Top 0.254: 92.21,30.48 U$28.X2
N$56
  Top 0.203: JP14.1 91.71,28.44
  Top 0.254: 91.71,28.44 U$28.Y1
N$57
  Top 0.203: 13.96,41.64 JP15.4
  Top 0.254: 13.96,41.64 U$30.X1
N$58
  Top 0.203: 13.46,43.68 JP15.3
  Top 0.254: 13.46,43.68 U$30.Y2
N$59
  Top 0.203: JP15.2 12.96,43.68
  Top 0.254: 12.96,43.68 U$30.X2
N$60
  Top 0.203: JP15.1 12.46,41.64
  Top 0.254: 12.46,41.64 U$30.Y1
N$61
  Top 0.203: 27.17,41.64 JP16.4
  Top 0.254: 27.17,41.64 U$32.X1
N$62
  Top 0.203: 26.67,43.68 JP16.3
  Top 0.254: 26.67,43.68 U$32.Y2
N$63
  Top 0.203: JP16.2 26.17,43.68
  Top 0.254: 26.17,43.68 U$32.X2
N$64
  Top 0.203: JP16.1 25.67,41.64
  Top 0.254: 25.67,41.64 U$32.Y1
N$65
  Top 0.203: 40.37,41.64 JP17.4
  Top 0.254: 40.37,41.64 U$34.X1
N$66
  Top 0.203: 39.87,43.68 JP17.3
  Top 0.254: 39.87,43.68 U$34.Y2
N$67
  Top 0.203: JP17.2 39.37,43.68
  Top 0.254: 39.37,43.68 U$34.X2
N$68
  Top 0.203: JP17.1 38.87,41.64
  Top 0.254: 38.87,41.64 U$34.Y1
N$69
  Top 0.203: 53.58,41.64 JP18.4
  Top 0.254: 53.58,41.64 U$36.X1
N$70
  Top 0.203: 53.08,43.68 JP18.3
  Top 0.254: 53.08,43.68 U$36.Y2
N$71
  Top 0.203: JP18.2 52.58,43.68
  Top 0.254: 52.58,43.68 U$36.X2
N$72
  Top 0.203: JP18.1 52.08,41.64
  Top 0.254: 52.08,41.64 U$36.Y1
N$73
  Top 0.203: 66.79,41.64 JP19.4
  Top 0.254: 66.79,41.64 U$38.X1
N$74
  Top 0.203: 66.29,43.68 JP19.3
  Top 0.254: 66.29,43.68 U$38.Y2
N$75
  Top 0.203: JP19.2 65.79,43.68
  Top 0.254: 65.79,43.68 U$38.X2
N$76
  Top 0.203: JP19.1 65.29,41.64
  Top 0.254: 65.29,41.64 U$38.Y1
N$77
  Top 0.203: 80,41.64 JP20.4
  Top 0.254: 80,41.64 U$40.X1
N$78
  Top 0.203: 79.5,43.68 JP20.3
  Top 0.254: 79.5,43.68 U$40.Y2
N$79
  Top 0.203: JP20.2 79,43.68
  Top 0.254: 79,43.68 U$40.X2
N$80
  Top 0.203: JP20.1 78.5,41.64
  Top 0.254: 78.5,41.64 U$40.Y1
N$81
  Top 0.203: 93.21,41.64 JP21.4
  Top 0.254: 93.21,41.64 U$42.X1
N$82
  Top 0.203: 92.71,43.68 JP21.3
  Top 0.254: 92.71,43.68 U$42.Y2
N$83
  Top 0.203: JP21.2 92.21,43.68
  Top 0.254: 92.21,43.68 U$42.X2
N$84
  Top 0.203: JP21.1 91.71,41.64
  Top 0.254: 91.71,41.64 U$42.Y1
N$85
  Top 0.203: 13.96,54.85 JP22.4
  Top 0.254: 13.96,54.85 U$44.X1
N$86
  Top 0.203: 13.46,56.89 JP22.3
  Top 0.254: 13.46,56.89 U$44.Y2
N$87
  Top 0.203: JP22.2 12.96,56.89
  Top 0.254: 12.96,56.89 U$44.X2
N$88
  Top 0.203: JP22.1 12.46,54.85
  Top 0.254: 12.46,54.85 U$44.Y1
N$89
  Top 0.203: 27.17,54.85 JP23.4
  Top 0.254: 27.17,54.85 U$46.X1
N$90
  Top 0.203: 26.67,56.89 JP23.3
  Top 0.254: 26.67,56.89 U$46.Y2
N$91
  Top 0.203: JP23.2 26.17,56.89
  Top 0.254: 26.17,56.89 U$46.X2
N$92
  Top 0.203: JP23.1 25.67,54.85
  Top 0.254: 25.67,54.85 U$46.Y1
N$93
  Top 0.203: 40.37,54.85 JP24.4
  Top 0.254: 40.37,54.85 U$48.X1
N$94
  Top 0.203: 39.87,56.89 JP24.3
  Top 0.254: 39.87,56.89 U$48.Y2
N$95
  Top 0.203: JP24.2 39.37,56.89
  Top 0.254: 39.37,56.89 U$48.X2
N$96
  Top 0.203: JP24.1 38.87,54.85
  Top 0.254: 38.87,54.85 U$48.Y1
N$97
  Top 0.203: 53.58,54.85 JP25.4
  Top 0.254: 53.58,54.85 U$50.X1
N$98
  Top 0.203: 53.08,56.89 JP25.3
  Top 0.254: 53.08,56.89 U$50.Y2
N$99
  Top 0.203: JP25.2 52.58,56.89
  Top 0.254: 52.58,56.89 U$50.X2
N$100
  Top 0.203: JP25.1 52.08,54.85
  Top 0.254: 52.08,54.85 U$50.Y1
N$101
  Top 0.203: 66.79,54.85 JP26.4
  Top 0.254: 66.79,54.85 U$52.X1
N$102
  Top 0.203: 66.29,56.89 JP26.3
  Top 0.254: 66.29,56.89 U$52.Y2
N$103
  Top 0.203: JP26.2 65.79,56.89
  Top 0.254: 65.79,56.89 U$52.X2
N$104
  Top 0.203: JP26.1 65.29,54.85
  Top 0.254: 65.29,54.85 U$52.Y1
N$105
  Top 0.203: 80,54.85 JP27.4
  Top 0.254: 80,54.85 U$54.X1
N$106
  Top 0.203: 79.5,56.89 JP27.3
  Top 0.254: 79.5,56.89 U$54.Y2
N$107
  Top 0.203: JP27.2 79,56.89
  Top 0.254: 79,56.89 U$54.X2
N$108
  Top 0.203: JP27.1 78.5,54.85
  Top 0.254: 78.5,54.85 U$54.Y1
N$109
  Top 0.203: 93.21,54.85 JP28.4
  Top 0.254: 93.21,54.85 U$56.X1
N$110
  Top 0.203: 92.71,56.89 JP28.3
  Top 0.254: 92.71,56.89 U$56.Y2
N$111
  Top 0.203: JP28.2 92.21,56.89
  Top 0.254: 92.21,56.89 U$56.X2
N$112
  Top 0.203: JP28.1 91.71,54.85
  Top 0.254: 91.71,54.85 U$56.Y1
N$113
  Top 0.203: 13.96,68.06 JP29.4
  Top 0.254: 13.96,68.06 U$58.X1
N$114
  Top 0.203: 13.46,70.1 JP29.3
  Top 0.254: 13.46,70.1 U$58.Y2
N$115
  Top 0.203: JP29.2 12.96,70.1
  Top 0.254: 12.96,70.1 U$58.X2
N$116
  Top 0.203: JP29.1 12.46,68.06
  Top 0.254: 12.46,68.06 U$58.Y1
N$117
  Top 0.203: 27.17,68.06 JP30.4
  Top 0.254: 27.17,68.06 U$60.X1
N$118
  Top 0.203: 26.67,70.1 JP30.3
  Top 0.254: 26.67,70.1 U$60.Y2
N$119
  Top 0.203: JP30.2 26.17,70.1
  Top 0.254: 26.17,70.1 U$60.X2
N$120
  Top 0.203: JP30.1 25.67,68.06
  Top 0.254: 25.67,68.06 U$60.Y1
N$121
  Top 0.203: 40.37,68.06 JP31.4
  Top 0.254: 40.37,68.06 U$62.X1
N$122
  Top 0.203: 39.87,70.1 JP31.3
  Top 0.254: 39.87,70.1 U$62.Y2
N$123
  Top 0.203: JP31.2 39.37,70.1
  Top 0.254: 39.37,70.1 U$62.X2
N$124
  Top 0.203: JP31.1 38.87,68.06
  Top 0.254: 38.87,68.06 U$62.Y1
N$125
  Top 0.203: 53.58,68.06 JP32.4
  Top 0.254: 53.58,68.06 U$64.X1
N$126
  Top 0.203: 53.08,70.1 JP32.3
  Top 0.254: 53.08,70.1 U$64.Y2
N$127
  Top 0.203: JP32.2 52.58,70.1
  Top 0.254: 52.58,70.1 U$64.X2
N$128
  Top 0.203: JP32.1 52.08,68.06
  Top 0.254: 52.08,68.06 U$64.Y1
N$129
  Top 0.203: 66.79,68.06 JP33.4
  Top 0.254: 66.79,68.06 U$66.X1
N$130
  Top 0.203: 66.29,70.1 JP33.3
  Top 0.254: 66.29,70.1 U$66.Y2
N$131
  Top 0.203: JP33.2 65.79,70.1
  Top 0.254: 65.79,70.1 U$66.X2
N$132
  Top 0.203: JP33.1 65.29,68.06
  Top 0.254: 65.29,68.06 U$66.Y1
N$133
  Top 0.203: 80,68.06 JP34.4
  Top 0.254: 80,68.06 U$68.X1
N$134
  Top 0.203: 79.5,70.1 JP34.3
  Top 0.254: 79.5,70.1 U$68.Y2
N$135
  Top 0.203: JP34.2 79,70.1
  Top 0.254: 79,70.1 U$68.X2
N$136
  Top 0.203: JP34.1 78.5,68.06
  Top 0.254: 78.5,68.06 U$68.Y1
N$137
  Top 0.203: 93.21,68.06 JP35.4
  Top 0.254: 93.21,68.06 U$70.X1
N$138
  Top 0.203: 92.71,70.1 JP35.3
  Top 0.254: 92.71,70.1 U$70.Y2
N$139
  Top 0.203: JP35.2 92.21,70.1
  Top 0.254: 92.21,70.1 U$70.X2
N$140
  Top 0.203: JP35.1 91.71,68.06
  Top 0.254: 91.71,68.06 U$70.Y1
N$141
  Top 0.203: 13.96,81.27 JP36.4
  Top 0.254: 13.96,81.27 U$72.X1
N$142
  Top 0.203: 13.46,83.31 JP36.3
  Top 0.254: 13.46,83.31 U$72.Y2
N$143
  Top 0.203: JP36.2 12.96,83.31
  Top 0.254: 12.96,83.31 U$72.X2
N$144
  Top 0.203: JP36.1 12.46,81.27
  Top 0.254: 12.46,81.27 U$72.Y1
N$145
  Top 0.203: 27.17,81.27 JP37.4
  Top 0.254: 27.17,81.27 U$74.X1
N$146
  Top 0.203: 26.67,83.31 JP37.3
  Top 0.254: 26.67,83.31 U$74.Y2
N$147
  Top 0.203: JP37.2 26.17,83.31
  Top 0.254: 26.17,83.31 U$74.X2
N$148
  Top 0.203: JP37.1 25.67,81.27
  Top 0.254: 25.67,81.27 U$74.Y1
N$149
  Top 0.203: 40.37,81.27 JP38.4
  Top 0.254: 40.37,81.27 U$76.X1
N$150
  Top 0.203: 39.87,83.31 JP38.3
  Top 0.254: 39.87,83.31 U$76.Y2
N$151
  Top 0.203: JP38.2 39.37,83.31
  Top 0.254: 39.37,83.31 U$76.X2
N$152
  Top 0.203: JP38.1 38.87,81.27
  Top 0.254: 38.87,81.27 U$76.Y1
N$153
  Top 0.203: 53.58,81.27 JP39.4
  Top 0.254: 53.58,81.27 U$78.X1
N$154
  Top 0.203: 53.08,83.31 JP39.3
  Top 0.254: 53.08,83.31 U$78.Y2
N$155
  Top 0.203: JP39.2 52.58,83.31
  Top 0.254: 52.58,83.31 U$78.X2
N$156
  Top 0.203: JP39.1 52.08,81.27
  Top 0.254: 52.08,81.27 U$78.Y1
N$157
  Top 0.203: 66.79,81.27 JP40.4
  Top 0.254: 66.79,81.27 U$80.X1
N$158
  Top 0.203: 66.29,83.31 JP40.3
  Top 0.254: 66.29,83.31 U$80.Y2
N$159
  Top 0.203: JP40.2 65.79,83.31
  Top 0.254: 65.79,83.31 U$80.X2
N$160
  Top 0.203: JP40.1 65.29,81.27
  Top 0.254: 65.29,81.27 U$80.Y1
N$161
  Top 0.203: 80,81.27 JP41.4
  Top 0.254: 80,81.27 U$82.X1
N$162
  Top 0.203: 79.5,83.31 JP41.3
  Top 0.254: 79.5,83.31 U$82.Y2
N$163
  Top 0.203: JP41.2 79,83.31
  Top 0.254: 79,83.31 U$82.X2
N$164
  Top 0.203: JP41.1 78.5,81.27
  Top 0.254: 78.5,81.27 U$82.Y1
N$165
  Top 0.203: 93.21,81.27 JP42.4
  Top 0.254: 93.21,81.27 U$84.X1
N$166
  Top 0.203: 92.71,83.31 JP42.3
  Top 0.254: 92.71,83.31 U$84.Y2
N$167
  Top 0.203: JP42.2 92.21,83.31
  Top 0.254: 92.21,83.31 U$84.X2
N$168
  Top 0.203: JP42.1 91.71,81.27
  Top 0.254: 91.71,81.27 U$84.Y1
N$169
  Top 0.203: 13.96,94.48 JP43.4
  Top 0.254: 13.96,94.48 U$86.X1
N$170
  Top 0.203: 13.46,96.52 JP43.3
  Top 0.254: 13.46,96.52 U$86.Y2
N$171
  Top 0.203: JP43.2 12.96,96.52
  Top 0.254: 12.96,96.52 U$86.X2
N$172
  Top 0.203: JP43.1 12.46,94.48
  Top 0.254: 12.46,94.48 U$86.Y1
N$173
  Top 0.203: 27.17,94.48 JP44.4
  Top 0.254: 27.17,94.48 U$88.X1
N$174
  Top 0.203: 26.67,96.52 JP44.3
  Top 0.254: 26.67,96.52 U$88.Y2
N$175
  Top 0.203: JP44.2 26.17,96.52
  Top 0.254: 26.17,96.52 U$88.X2
N$176
  Top 0.203: JP44.1 25.67,94.48
  Top 0.254: 25.67,94.48 U$88.Y1
N$177
  Top 0.203: 40.37,94.48 JP45.4
  Top 0.254: 40.37,94.48 U$90.X1
N$178
  Top 0.203: 39.87,96.52 JP45.3
  Top 0.254: 39.87,96.52 U$90.Y2
N$179
  Top 0.203: JP45.2 39.37,96.52
  Top 0.254: 39.37,96.52 U$90.X2
N$180
  Top 0.203: JP45.1 38.87,94.48
  Top 0.254: 38.87,94.48 U$90.Y1
N$181
  Top 0.203: 53.58,94.48 JP46.4
  Top 0.254: 53.58,94.48 U$92.X1
N$182
  Top 0.203: 53.08,96.52 JP46.3
  Top 0.254: 53.08,96.52 U$92.Y2
N$183
  Top 0.203: JP46.2 52.58,96.52
  Top 0.254: 52.58,96.52 U$92.X2
N$184
  Top 0.203: JP46.1 52.08,94.48
  Top 0.254: 52.08,94.48 U$92.Y1
N$185
  Top 0.203: 66.79,94.48 JP47.4
  Top 0.254: 66.79,94.48 U$94.X1
N$186
  Top 0.203: 66.29,96.52 JP47.3
  Top 0.254: 66.29,96.52 U$94.Y2
N$187
  Top 0.203: JP47.2 65.79,96.52
  Top 0.254: 65.79,96.52 U$94.X2
N$188
  Top 0.203: JP47.1 65.29,94.48
  Top 0.254: 65.29,94.48 U$94.Y1
N$189
  Top 0.203: 80,94.48 JP48.4
  Top 0.254: 80,94.48 U$96.X1
N$190
  Top 0.203: 79.5,96.52 JP48.3
  Top 0.254: 79.5,96.52 U$96.Y2
N$191
  Top 0.203: JP48.2 79,96.52
  Top 0.254: 79,96.52 U$96.X2
N$192
  Top 0.203: JP48.1 78.5,94.48
  Top 0.254: 78.5,94.48 U$96.Y1
N$193
  Top 0.203: 93.21,94.48 JP49.4
  Top 0.254: 93.21,94.48 U$98.X1
N$194
  Top 0.203: 92.71,96.52 JP49.3
  Top 0.254: 92.71,96.52 U$98.Y2
N$195
  Top 0.203: JP49.2 92.21,96.52
  Top 0.254: 92.21,96.52 U$98.X2
N$196
  Top 0.203: JP49.1 91.71,94.48
  Top 0.254: 91.71,94.48 U$98.Y1

## Text on the board
tPlace: Y1 | X2 | Y2 | X1 | Y1 | X2 | Y2 | X1 | Y1 | X2 | Y2 | X1 | Y1 | X2 | Y2 | X1 | Y1 | X2 | Y2 | X1 | Y1 | X2 | Y2 | X1 | Y1 | X2 | Y2 | X1 | Y1 | X2 | Y2 | X1 | Y1 | X2 | Y2 | X1 | Y1 | X2 | Y2 | X1 | Y1 | X2 | Y2 | X1 | Y1 | X2 | Y2 | X1 | Y1 | X2 | Y2 | X1 | Y1 | X2 | Y2 | X1 | Y1 | X2 | Y2 | X1 | Y1 | X2 | Y2 | X1 | Y1 | X2 | Y2 | X1 | Y1 | X2 | Y2 | X1 | Y1 | X2 | Y2 | X1 | Y1 | X2 | Y2 | X1 | Y1 | X2 | Y2 | X1 | Y1 | X2 | Y2 | X1 | Y1 | X2 | Y2 | X1 | Y1 | X2 | Y2 | X1 | Y1 | X2 | Y2 | X1 | Y1 | X2 | Y2 | X1 | Y1 | X2 | Y2 | X1 | Y1 | X2 | Y2 | X1 | Y1 | X2 | Y2 | X1 | Y1 | X2 | Y2 | X1 | Y1 | X2 | Y2 | X1 | Y1 | X2 | Y2 | X1 | Y1 | X2 | Y2 | X1 | Y1 | X2 | Y2 | X1 | Y1 | X2 | Y2 | X1 | Y1 | X2 | Y2 | X1 | Y1 | X2 | Y2 | X1 | Y1 | X2 | Y2 | X1 | Y1 | X2 | Y2 | X1 | Y1 | X2 | Y2 | X1 | Y1 | X2 | Y2 | X1 | Y1 | X2 | Y2 | X1 | Y1 | X2 | Y2 | X1 | Y1 | X2 | Y2 | X1 | Y1 | X2 | Y2 | X1 | Y1 | X2 | Y2 | X1 | Y1 | X2 | Y2 | X1 | Y1 | X2 | Y2 | X1 | Y1 | X2 | Y2 | X1